# EAGLE board MOSFETboard (EAGLE 9.6.2)
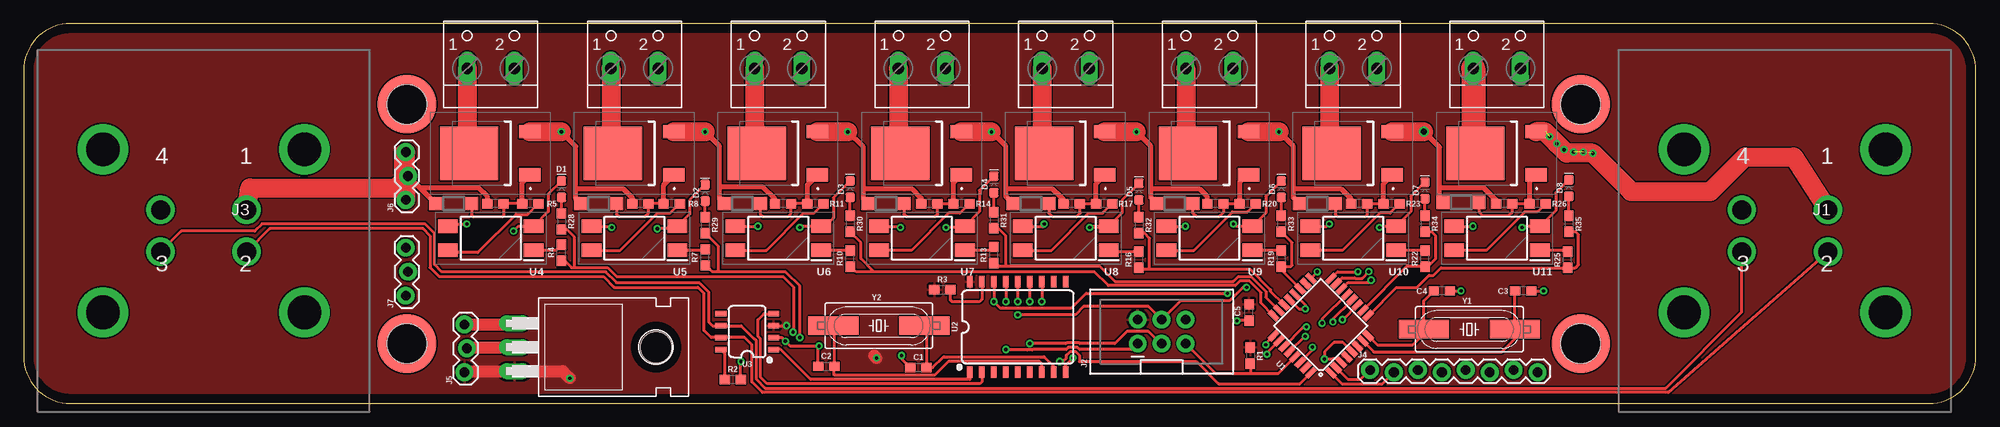
[diagram p0: board, top side]
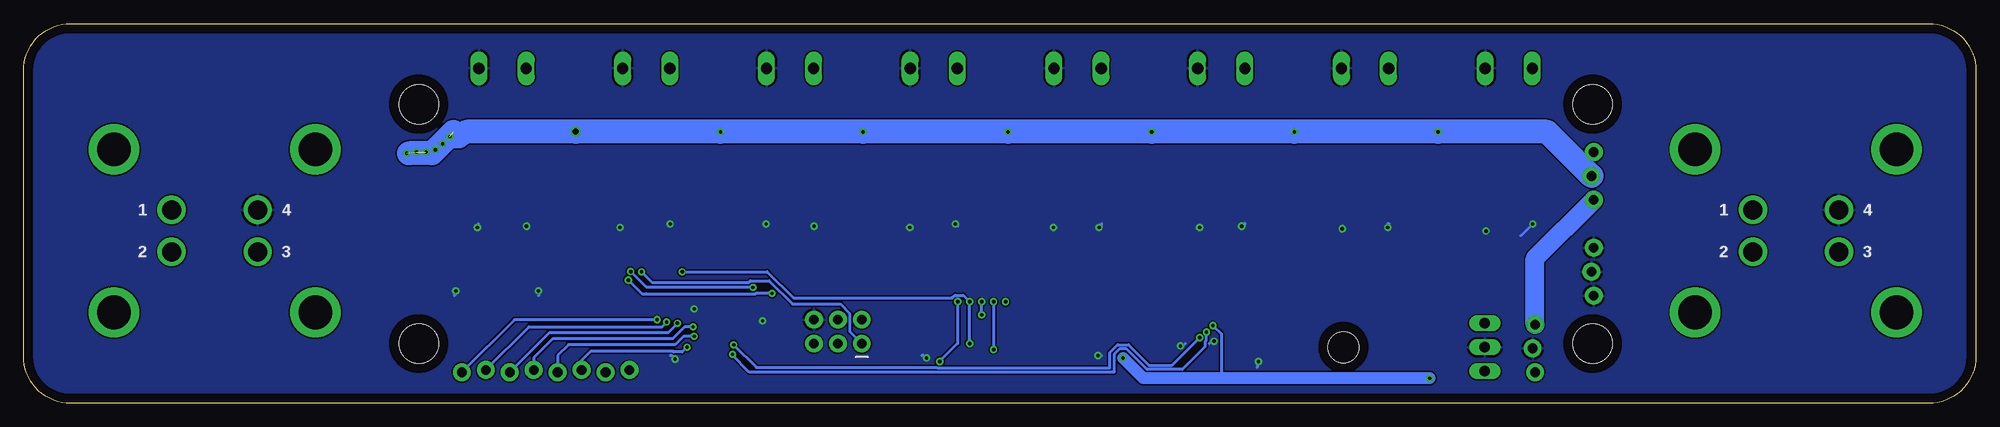
[diagram p1: board, bottom side, seen from below]

Size 206.99 x 40.31 mm. Coordinates in mm from the lower left corner, seen from the top.
Outline: 0,35.31 0,5 arc90 5,0 201.99,0 arc90 206.99,5 206.99,35.31 arc90 201.99,40.31 5,40.31 arc90 0,35.31
Copper layers (1*16): Top 0.035mm / dielectric 1.5mm / Bottom 0.035mm
Design rules "default": minimum track width 6mil, minimum drill 0.35mm, track to track 6mil, track to pad 6mil, pad to pad 6mil, via to via 6mil, smd to smd 6mil, copper to edge 40mil, drill to drill 6mil, minimum pad ring 10mil, minimum via ring 8mil, stop-mask expansion 4mil, vias tented up to drill 0mil, thermal gap 10mil
Net classes: 0 default: width 0.305 mm

## Footprints (pad centres in the part's own frame; a part is rotated, then mirrored left to right if it is on the bottom)
0603 = smd 1.1 x 1: 1 -0.85,0; 2 0.85,0
LED-0603 = smd 1 x 1: A -0.877,0; C 0.877,0
SOD123 = smd 1.4 x 1.4: A 1.9,0; C -1.9,0
TO220H = drill 1.118 long: 1 -2.54,-10.16; 2 0,-10.16; 3 2.54,-10.16 | hole 3.302: 0,4.826
DT154P = drill 2.01 pad 3.015: 1 4.599,2.215; 2 4.599,-2.235; 3 -4.521,-2.235; 4 -4.521,2.215 | drill 3.56 pad 5.34: MH1 -10.631,-8.66; MH2 -10.631,8.64; MH3 10.709,8.64; MH4 10.709,-8.66
2X3-SHROUDED = drill 1.016 pad 1.88: 1 -1.27,2.54; 2 1.27,2.54; 3 -1.27,0; 4 1.27,0; 5 -1.27,-2.54; 6 1.27,-2.54
1X08_LOCK = drill 1.016 pad 1.88: 1 0,0.127; 2 2.54,-0.127; 3 5.08,0.127; 4 7.62,-0.127; 5 10.16,0.127; 6 12.7,-0.127; 7 15.24,0.127; 8 17.78,-0.127
1X03_LOCK = drill 1.016 pad 1.88: 1 0,0.127; 2 2.54,-0.127; 3 5.08,0.127
IRFR9014TRPBFBE3 = smd 1.397 x 2.286: 1 -2.286,-6.435; 3 2.286,-6.435 | smd 5.69 x 6.18: 2 0,0
TQFP32-08 = smd 1.27 x 0.559: 1 -4.293,2.8; 2 -4.293,2; 3 -4.293,1.2; 4 -4.293,0.4; 5 -4.293,-0.4; 6 -4.293,-1.2; 7 -4.293,-2; 8 -4.293,-2.8; 17 4.293,-2.8; 18 4.293,-2; 19 4.293,-1.2; 20 4.293,-0.4; 21 4.293,0.4; 22 4.293,1.2; 23 4.293,2; 24 4.293,2.8 | smd 0.559 x 1.27: 9 -2.8,-4.293; 10 -2,-4.293; 11 -1.2,-4.293; 12 -0.4,-4.293; 13 0.4,-4.293; 14 1.2,-4.293; 15 2,-4.293; 16 2.8,-4.293; 25 2.8,4.293; 26 2,4.293; 27 1.2,4.293; 28 0.4,4.293; 29 -0.4,4.293; 30 -1.2,4.293; 31 -2,4.293; 32 -2.8,4.293
SO18W = smd 0.6 x 1.2: 1 -5.08,-4.788; 2 -3.81,-4.788; 3 -2.54,-4.788; 4 -1.27,-4.788; 5 0,-4.788; 6 1.27,-4.788; 7 2.54,-4.788; 8 3.81,-4.788; 9 5.08,-4.788; 10 5.08,4.788; 11 3.81,4.788; 12 2.54,4.788; 13 1.27,4.788; 14 0,4.788; 15 -1.27,4.788; 16 -2.54,4.788; 17 -3.81,4.788; 18 -5.08,4.788
SO08 = smd 0.6 x 1.2: 1 -1.905,-2.8; 2 -0.635,-2.8; 3 0.635,-2.8; 4 1.905,-2.8; 5 1.905,2.8; 6 0.635,2.8; 7 -0.635,2.8; 8 -1.905,2.8
SOP254P1016X460-4N = smd 2.1 x 1.45: 1 -4.55,1.27; 2 -4.55,-1.27; 3 4.55,-1.27; 4 4.55,1.27
M3SMDSTANDOFF = smd 6.2 x 6.2: P$1 0,0 | hole 4.2: 0,0
W237-102 = drill 1.194 long: 1 -2.5,-1.27; 2 2.5,-1.27
HC49UP = smd 5.334 x 1.93: 1 -4.826,0; 2 4.826,0

## Placement (x,y rotation side)
C1  22pF  [0603]  94.87,3.81 0 top
C2  22pF  [0603]  85.09,3.94 0 top
C3  22pF  [0603]  159,11.94 180 top
C4  22pF  [0603]  150.37,11.94 180 top
C5  1uF  [0603]  129.92,9.65 90 top
D1  [LED-0603]  57.02,22.73 90 top
D2  [LED-0603]  72.26,22.35 90 top
D3  [LED-0603]  87.63,22.73 90 top
D4  [LED-0603]  102.87,23.24 90 top
D5  [LED-0603]  118.24,22.48 90 top
D6  [LED-0603]  133.35,22.73 90 top
D7  [LED-0603]  148.59,22.61 90 top
D8  [LED-0603]  163.83,22.86 90 top
D9  [SOD123]  45.59,21.21 0 top
D10  [SOD123]  60.96,21.21 0 top
D11  [SOD123]  76.2,21.21 0 top
D12  [SOD123]  91.44,21.21 0 top
D13  [SOD123]  106.81,21.21 0 top
D14  [SOD123]  122.05,21.21 0 top
D15  [SOD123]  137.16,21.21 0 top
D16  [SOD123]  152.4,21.34 0 top
IC1  7805T  [TO220H]  62.23,5.97 270 top
J1  DT15-4P  [DT154P]  186.69,18.32 0 top
J2  [2X3-SHROUDED]  120.65,7.62 90 top
J3  DT15-4P  [DT154P]  19.05,18.32 0 top
J4  [1X08_LOCK]  142.75,3.43 0 top
J5  [1X03_LOCK]  46.86,3.3 90 top
J6  [1X03_LOCK]  40.64,21.59 90 top
J7  [1X03_LOCK]  40.64,11.43 90 top
Q9  IRFR9014TRPBF-BE3  [IRFR9014TRPBFBE3]  47.24,26.54 90 top
Q10  IRFR9014TRPBF-BE3  [IRFR9014TRPBFBE3]  62.48,26.54 90 top
Q11  IRFR9014TRPBF-BE3  [IRFR9014TRPBFBE3]  77.72,26.54 90 top
Q12  IRFR9014TRPBF-BE3  [IRFR9014TRPBFBE3]  92.96,26.54 90 top
Q13  IRFR9014TRPBF-BE3  [IRFR9014TRPBFBE3]  108.2,26.54 90 top
Q14  IRFR9014TRPBF-BE3  [IRFR9014TRPBFBE3]  123.44,26.54 90 top
Q15  IRFR9014TRPBF-BE3  [IRFR9014TRPBFBE3]  138.68,26.54 90 top
Q16  IRFR9014TRPBF-BE3  [IRFR9014TRPBFBE3]  153.92,26.54 90 top
R1  1k  [0603]  130.05,5.08 270 top
R2  10k  [0603]  75.18,2.54 0 top
R3  10k  [0603]  97.41,12.06 0 top
R4  470R  [0603]  57.02,16 90 top
R5  3.3k  [0603]  53.72,21.21 180 top
R6  33k  [0603]  50.04,21.21 180 top
R7  470R  [0603]  72.26,15.49 90 top
R8  3.3k  [0603]  68.71,21.21 180 top
R9  33k  [0603]  65.41,21.21 180 top
R10  470R  [0603]  87.63,15.37 90 top
R11  3.3k  [0603]  83.95,21.21 180 top
R12  33k  [0603]  80.52,21.21 180 top
R13  470R  [0603]  102.87,15.75 90 top
R14  3.3k  [0603]  99.44,21.21 180 top
R15  33k  [0603]  96.01,21.21 180 top
R16  470R  [0603]  118.24,15.24 90 top
R17  3.3k  [0603]  114.55,21.21 180 top
R18  33k  [0603]  111.12,21.21 180 top
R19  470R  [0603]  133.35,15.37 90 top
R20  3.3k  [0603]  129.79,21.21 180 top
R21  33k  [0603]  126.36,21.21 180 top
R22  470R  [0603]  148.59,15.37 90 top
R23  3.3k  [0603]  145.03,21.21 180 top
R24  33k  [0603]  141.6,21.21 180 top
R25  470R  [0603]  163.7,15.24 90 top
R26  3.3k  [0603]  160.53,21.21 180 top
R27  33k  [0603]  156.97,21.21 180 top
R28  1K  [0603]  57.02,19.3 270 top
R29  1K  [0603]  72.26,18.92 270 top
R30  1K  [0603]  87.63,19.05 270 top
R31  1K  [0603]  102.87,19.43 270 top
R32  1K  [0603]  118.24,18.92 270 top
R33  1K  [0603]  133.35,19.05 270 top
R34  1K  [0603]  148.59,19.05 270 top
R35  1K  [0603]  163.83,19.05 270 top
U1  ATMEGA328P_TQFP  [TQFP32-08]  137.54,8.26 135 top
U2  MCP2515  [SO18W]  105.41,8.13 0 top
U3  MCP2551  [SO08]  76.71,7.62 90 top
U4  LTV-817S  [SOP254P1016X460-4N]  49.53,17.53 180 top
U5  LTV-817S  [SOP254P1016X460-4N]  64.77,17.53 180 top
U6  LTV-817S  [SOP254P1016X460-4N]  80.01,17.53 180 top
U7  LTV-817S  [SOP254P1016X460-4N]  95.25,17.53 180 top
U8  LTV-817S  [SOP254P1016X460-4N]  110.49,17.53 180 top
U9  LTV-817S  [SOP254P1016X460-4N]  125.73,17.53 180 top
U10  LTV-817S  [SOP254P1016X460-4N]  140.97,17.53 180 top
U11  LTV-817S  [SOP254P1016X460-4N]  156.21,17.53 180 top
U$1  KEYSTONEM3  [M3SMDSTANDOFF]  40.64,31.75 0 top
U$2  KEYSTONEM3  [M3SMDSTANDOFF]  40.64,6.35 0 top
U$3  KEYSTONEM3  [M3SMDSTANDOFF]  165.1,31.75 0 top
U$4  KEYSTONEM3  [M3SMDSTANDOFF]  165.1,6.35 0 top
X2  [W237-102]  49.53,36.83 0 top
X3  [W237-102]  64.77,36.83 0 top
X4  [W237-102]  80.01,36.83 0 top
X5  [W237-102]  95.25,36.83 0 top
X6  [W237-102]  110.49,36.83 0 top
X7  [W237-102]  125.73,36.83 0 top
X8  [W237-102]  140.97,36.83 0 top
X9  [W237-102]  156.21,36.83 0 top
Y1  16MHz  [HC49UP]  153.29,7.87 0 top
Y2  8MHz  [HC49UP]  90.68,8.26 0 top

## Library data of the parts
C1-C5 = SparkFun-Capacitors; PROD_ID: CAP-07876
D1-D8 = SparkFun-LED
D9-D16 = diode
IC1 = linear
J1 J3 = DT15-4P; DESCRIPTION: Deutsch DT15 Series, 4.44mm Pitch 4 Way 2 Row Straight PCB Header, Solder Termination; HEIGHT: 30.35mm; MANUFACTURER_NAME: TE Connectivity; MANUFACTURER_PART_NUMBER: DT15-4P; MOUSER_PART_NUMBER: 571-DT15-4P; MOUSER_PRICE-STOCK: https://www.mouser.co.uk/ProductDetail/TE-Connectivity-DEUTSCH/DT15-4P?qs=vkMqrgFpRajtjo1r4fVe%2Fw%3D%3D
J2 = SparkFun-Connectors; PROD_ID: CONN-10681; SF_ID: PRT_10877
J4-J7 = SparkFun-Connectors
Q9-Q16 = SamacSys_Parts; DESCRIPTION: MOSFET 60V P-CH HEXFET MOSFET D; HEIGHT: 2.38mm; MANUFACTURER_NAME: Vishay; MANUFACTURER_PART_NUMBER: IRFR9014TRPBF-BE3; MOUSER_PART_NUMBER: 78-IRFR9014TRPBF-BE3; MOUSER_PRICE-STOCK: https://www.mouser.co.uk/ProductDetail/Vishay-Siliconix/IRFR9014TRPBF-BE3?qs=7MVldsJ5UaztV2jQZzH2pA%3D%3D
R1-R35 = SparkFun-Resistors; PROD_ID: RES-07856
U1 = SparkFun-IC-Microcontroller; PROD_ID: IC-09069
U2 = SparkFun-IC-Comms; PROD_ID: IC-09906
U3 = SparkFun-IC-Comms; PROD_ID: IC-09907
U4-U11 = SamacSys_Parts; DESCRIPTION: Optocoupler Transistor Output, 35V, SMD4 Lite-On LTV-817S DC Input Transistor Output Optocoupler, Surface Mount, 4-Pin SMD; HEIGHT: 4.6mm; MANUFACTURER_NAME: Lite-On; MANUFACTURER_PART_NUMBER: LTV-817S; MOUSER_PART_NUMBER: 859-LTV-817S; MOUSER_PRICE-STOCK: https://www.mouser.co.uk/ProductDetail/Lite-On/LTV-817S?qs=XpF7qU%252BvLkWYeWEC0OckNQ%3D%3D
U$1-U$4 = KeystoneSMD
X2-X9 = con-wago-500; MPN: 237-102; OC_FARNELL: unknown; OC_NEWARK: 70K9898
Y1 Y2 = SparkFun-Clocks; PROD_ID: XTAL-11706

## Nets
+12VCC1: D9.C D10.C D11.C D12.C D13.C D14.C D15.C D16.C IC1.1 J1.1 J3.1 J5.3 J6.1 J6.2 J6.3 Q9.3 Q10.3 Q11.3 Q12.3 Q13.3 Q14.3 Q15.3 Q16.3 R6.2 R9.2 R12.2 R15.2 R18.2 R21.2 R24.2 R27.2
ARDUINO0: J4.3 U1.30
ARDUINO1: U1.31
ARDUINO3: J4.2 U1.1
ARDUINO4: J4.1 U1.2
ARDUINO5: R25.1 R35.2 U1.9
ARDUINO6: R22.1 R34.2 U1.10
ARDUINO7: J4.8 U1.11
ARDUINO8: J4.7 U1.12
ARDUINO9: J4.6 U1.13
ARDUINO14: R13.1 R31.2 U1.23
ARDUINO15: R10.1 R30.2 U1.24
ARDUINO16: R7.1 R29.2 U1.25
ARDUINO17: R4.1 R28.2 U1.26
ARDUINO18: J4.5 U1.27
ARDUINO19: J4.4 U1.28
ARDUINOA6: R19.1 R33.2 U1.19
ARDUINOA7: R16.1 R32.2 U1.22
CAN_INT: U1.32 U2.12
CANH: J1.2 J3.2 U3.7
CANL: J1.3 J3.3 U3.6
CS: U1.14 U2.16
GND: C1.1 C2.1 C3.1 C4.1 C5.1 D1.C D2.C D3.C D4.C D5.C D6.C D7.C D8.C IC1.2 J1.4 J2.6 J3.4 J5.2 J7.1 J7.2 J7.3 R2.2 U1.3 U1.5 U1.20 U1.21 U2.9 U3.2 U4.2 U4.3 U5.2 U5.3 U6.2 U6.3 U7.2 U7.3 U8.2 U8.3 U9.2 U9.3 U10.2 U10.3 U11.2 U11.3 X2.2 X3.2 X4.2 X5.2 X6.2 X7.2 X8.2 X9.2
MISO: J2.1 U1.16 U2.15
MOSI: J2.4 U1.15 U2.14
N$1: U2.1 U3.1
N$2: U2.2 U3.4
N$3: C2.2 U2.7 Y2.1
N$4: C1.2 U2.8 Y2.2
N$5: C4.2 U1.8 Y1.1
N$6: C3.2 U1.7 Y1.2
N$7: R2.1 U3.8
N$8: R3.2 U2.17
N$9: R4.2 U4.1
N$10: R5.1 U4.4
N$11: D9.A Q9.1 R5.2 R6.1
N$12: R7.2 U5.1
N$13: R8.1 U5.4
N$14: D10.A Q10.1 R8.2 R9.1
N$15: R10.2 U6.1
N$16: R11.1 U6.4
N$17: D11.A Q11.1 R11.2 R12.1
N$18: R13.2 U7.1
N$19: R14.1 U7.4
N$20: D12.A Q12.1 R14.2 R15.1
N$21: R16.2 U8.1
N$22: R17.1 U8.4
N$23: D13.A Q13.1 R17.2 R18.1
N$24: R19.2 U9.1
N$25: R20.1 U9.4
N$26: D14.A Q14.1 R20.2 R21.1
N$27: R22.2 U10.1
N$28: R23.1 U10.4
N$29: D15.A Q15.1 R23.2 R24.1
N$30: R25.2 U11.1
N$31: R26.1 U11.4
N$32: D16.A Q16.1 R26.2 R27.1
N$33: D1.A R28.1
N$34: D2.A R29.1
N$35: D3.A R30.1
N$36: D4.A R31.1
N$37: D5.A R32.1
N$38: D6.A R33.1
N$39: D7.A R34.1
N$40: D8.A R35.1
OUTPUT1: Q9.2 X2.1
OUTPUT2: Q10.2 X3.1
OUTPUT3: Q11.2 X4.1
OUTPUT4: Q12.2 X5.1
OUTPUT5: Q13.2 X6.1
OUTPUT6: Q14.2 X7.1
OUTPUT7: Q15.2 X8.1
OUTPUT8: Q16.2 X9.1
RST: J2.5 R1.2 U1.29
SCK: J2.3 U1.17 U2.13
VCC: C5.2 IC1.3 J2.2 J5.1 R1.1 R3.1 U1.4 U1.6 U1.18 U2.18 U3.3

## Tracks (layer width: path | path; a pad name or v marks a point on that pad's centre or on a via)
+12VCC1  (via drill 0.35, 0.65)  (3 unrouted)
  Top 0.305: 159.77,28.83 Q16.3
  Top 0.508: D16.C 150.11,21.72 150.11,22.86 | v148.46,28.83 150.11,27.18 150.11,22.86 | D15.C 134.62,21.85 134.62,22.73 | v133.1,28.83 134.62,27.3 134.62,22.73 | D14.C 119.51,21.85 119.51,22.73 | v117.98,28.83 119.51,27.3 119.51,22.73 | D13.C 104.14,21.98 104.14,22.73 | v102.62,28.83 104.14,27.3 104.14,22.73 | D12.C 89.03,21.72 89.03,22.73 | v87.38,28.83 89.03,27.18 89.03,22.73 | D11.C 73.79,21.72 73.79,22.99 | v72.26,28.83 73.79,27.3 73.79,22.99 | D10.C 58.55,21.72 58.55,22.73 | v57.02,28.83 58.55,27.3 58.55,22.73 | R9.2 64.55,21.8 63.63,22.73 58.55,22.73 | R12.2 79.67,21.68 78.36,22.99 73.79,22.99 | R15.2 95.16,21.8 94.23,22.73 89.03,22.73 | R18.2 110.27,21.62 109.57,22.32 109.51,22.32 109.09,22.73 104.14,22.73 | R21.2 125.52,21.93 124.71,22.73 119.51,22.73 | R24.2 140.75,21.68 139.7,22.73 134.62,22.73 | R27.2 156.12,21.55 154.81,22.86 150.11,22.86 | R6.2 49.19,21.93 48.26,22.86 42.04,22.86 J6.2 D9.C
  Top 1.27: J5.3 51.94,8.38 IC1.1
  Top 2: J3.1 23.97,22.86 39.5,22.86 J6.2 | J1.1 187.66,26.16 182.5,26.16 178.82,22.48 170.43,22.48 v166.37,26.54 163.58,26.54 v162.56,27.56 161.29,28.83 Q16.3 | J6.1 40.51,23.88 J6.2 | J6.2 40.32,24.58 40.32,26.54 | J6.2 40.51,24.38 J6.3 | Q15.3 v148.46,28.83 | Q14.3 v133.1,28.83 | Q13.3 v117.98,28.83 | Q12.3 v102.62,28.83 | Q11.3 v87.38,28.83 | Q10.3 v72.26,28.83 | Q9.3 v57.02,28.83
  Bottom 0.305: 166.12,26.54 v166.37,26.54
  Bottom 2: J5.3 46.74,15.37 J6.1 | 160.02,28.83 160.78,28.07 162.05,28.07 v162.56,27.56
  Bottom 2.54: J6.2 45.47,28.83 v57.02,28.83 v72.26,28.83 v87.38,28.83 v102.62,28.83 v117.98,28.83 v133.1,28.83 v148.46,28.83 160.02,28.83 | 166.12,26.54 163.7,26.54 v163.32,26.92 161.42,28.83
  other vias: 164.34,26.67 165.35,26.67 161.8,28.32
ARDUINO0  (via drill 0.35)
  Top 0.305: U1.30 136.65,5.67 v136.65,5.97
  Bottom 0.305: v136.65,5.97 137.16,5.46 138.04,5.46 138.11,5.54 140.97,5.54 146.86,5.54 147.83,4.57 J4.3
ARDUINO3
  Top 0.305: U1.1 139.75,2.08 144.07,2.08 J4.2
ARDUINO4
  Top 0.305: U1.2 140.43,2.54 141.73,2.54 J4.1
ARDUINO5
  Top 0.305: U1.9 145.55,12.31 147.71,12.31 148.99,13.59 149.48,13.59 150.28,14.39 R25.1 164.5,14.39 164.85,14.73 164.85,17.91 164.55,18.2 R35.2
ARDUINO6
  Top 0.305: U1.10 146.63,14.52 R22.1 148.88,14.52 149.73,15.37 149.73,17.78 149.31,18.2 R34.2
ARDUINO7  (via drill 0.35)
  Top 0.305: U1.11 139.87,8.89 v139.83,8.89
  Bottom 0.305: J4.8 154.94,8.89 v139.83,8.89
ARDUINO8  (via drill 0.35)
  Top 0.305: U1.12 138.65,8.8 v138.81,8.64
  Bottom 0.305: v138.81,8.64 139.32,8.13 153.42,8.13 J4.7
ARDUINO9  (via drill 0.35)
  Top 0.305: U1.13 137.67,8.95 v137.67,8.51
  Bottom 0.305: v137.67,8.51 138.68,7.49 151.26,7.49 J4.6
ARDUINO14
  Top 0.305: 104.14,14.61 103.38,14.61 103.08,14.9 R13.1 | 104.14,14.61 114.05,14.61 115.7,12.95 128.27,12.95 128.78,13.46 130.14,13.46 131.7,11.9 131.7,11.27 U1.23 | 104.14,14.61 104.14,17.78 103.34,18.58 R31.2
ARDUINO15
  Top 0.305: R10.1 87.72,14.52 88.27,13.97 90.17,13.97 | 90.17,13.97 113.54,13.97 115.01,12.5 128.46,12.5 128.97,13 129.95,13 131.19,11.76 131.19,10.64 U1.24 | 90.17,13.97 88.77,15.37 88.77,17.06 R30.2
ARDUINO16  (via drill 0.35)
  Top 0.305: v131.7,6.22 131.7,6.37 U1.25 | v82.3,6.98 82.3,12.45 80.77,13.97 73.66,13.97 | R7.1 72.35,14.64 73.02,13.97 73.66,13.97 | R29.2 73.66,16.68 73.66,13.97
  Bottom 0.305: v131.7,6.22 129.29,3.81 110.19,3.81 110.14,3.76 91.82,3.76 91.82,5.4 91,6.22 89.84,6.22 87.69,4.06 85.22,4.06 v82.3,6.98
ARDUINO17  (via drill 0.35)
  Top 0.305: R4.1 57.37,15.15 58.09,14.43 58.42,14.43 | U1.26 131.83,5.37 v131.83,5.21 | 58.42,14.43 61.91,14.43 62.88,13.46 80.52,13.46 81.66,12.32 81.66,7.63 v81.59,7.56 | 58.42,14.43 58.42,17.65 57.62,18.45 R28.2
  Bottom 0.305: v131.83,5.21 131.83,5.08 130.05,3.3 91.36,3.3 91.36,5.21 90.81,5.77 90.03,5.77 87.88,3.61 84.15,3.61 81.74,6.02 81.74,6.54 81.59,6.69 v81.59,7.56
ARDUINO18  (via drill 0.35)
  Top 0.305: U1.27 135.72,8.13 v136.02,8.13
  Bottom 0.305: v136.02,8.13 136.91,8.13 138.18,6.86 150.88,6.86 152.91,4.83 J4.5
ARDUINO19  (via drill 0.35)
  Top 0.305: U1.28 135.83,7.11 v135.89,7.11
  Bottom 0.305: v135.89,7.11 137.03,7.11 137.92,6.22 149.22,6.22 150.37,5.08 J4.4
ARDUINOA6
  Top 0.305: R33.2 134.49,17.06 134.49,14.68 134.33,14.52 R19.1 133.35,14.14 U1.19
ARDUINOA7
  Top 0.305: R16.1 118.45,14.39 118.62,14.22 119.38,14.22 | 119.38,14.22 119.38,17.53 118.83,18.07 R32.2 | U1.22 132.21,11.89 132.21,12.06 130.05,14.22 119.38,14.22
CAN_INT  (via drill 0.35)
  Top 0.305: U2.12 v107.95,10.79 | U1.32 135.33,2.08 126.69,2.08 124.33,4.45 111.93,4.45 111.93,5.11 111.53,5.51 110.97,5.51 110.57,5.11 110.57,4.79 110.22,4.45 v109.85,4.45
  Bottom 0.305: v107.95,10.79 107.95,6.35 v109.85,4.45
CANH
  Top 0.305: J1.2 174.37,1.17 78.33,1.17 77.22,2.29 77.22,6.22 76.45,6.98 U3.7 72.9,6.98 72.14,7.75 72.14,11.68 71.5,12.32 62.61,12.32 61.47,13.46 44.07,13.46 43.1,14.43 43.1,17.78 42.34,18.54 26.11,18.54 J3.2
CANL
  Top 0.305: J1.3 182.17,9.7 174.09,1.63 78.64,1.63 77.67,2.59 77.67,6.67 77.47,6.87 77.47,6.86 76.07,8.26 U3.6 73.02,8.26 72.64,8.64 72.64,11.82 71.64,12.83 62.87,12.83 61.72,13.97 44.32,13.97 43.56,14.73 43.56,18.05 42.56,19.05 25.27,19.05 24.51,18.29 16.73,18.29 J3.3
CS  (via drill 0.35)
  Top 0.305: U2.16 v102.87,10.79 103.5,10.16 103.81,10.16 103.86,10.11 111.08,10.11 112.65,11.68 v127.63,11.68 | U1.14 140.42,12.83 142.62,12.83 v142.88,13.08
  Bottom 0.305: v127.63,11.68 129.34,11.68 129.38,11.64 140.97,11.64 141.43,11.64 v142.88,13.08
GND  (via drill 0.35)
  Top 0.305: D8.C 162.43,22.34 162.43,20.47 U11.2 159,18.8 v158.88,18.67 | D7.C 147.07,21.96 147.07,20.34 U10.2 143.89,18.8 v143.76,18.67 | D6.C 131.7,21.96 131.7,20.21 U9.2 128.52,18.8 v128.27,19.05 | D5.C 116.46,21.58 116.46,20.21 U8.2 | D4.C 101.35,22.59 101.35,20.34 U7.2 99.67,18.67 v97.79,18.67 | D3.C 85.85,21.83 85.85,19.68 84.45,18.29 84.45,18.69 U6.2 82.42,18.8 v82.3,18.67 | D2.C 70.61,21.58 70.61,20.09 U5.2 69.07,18.54 v67.18,18.54 | D1.C 55.63,22.21 55.63,20.34 U4.2 52.45,18.8 v51.94,18.29 | U4.3 45.23,19.05 v46.99,19.05 | U5.3 62.23,18.8 v62.36,18.67 | U6.3 v77.85,18.8 | U7.3 92.84,18.8 v92.96,18.67 | U8.3 108.2,18.8 v108.2,19.05 | U8.2 114.91,18.67 v113.03,18.67 | U8.2 113.03,18.8 | U9.3 v123.19,18.8 | U10.3 138.18,18.8 v138.43,19.05 | U1.21 135.2,10.03 v135.89,10.03 135.89,10.47 U1.20 | U1.3 139.34,4.76 138.78,4.76 138.73,4.7 v137.92,4.7 137.92,5.46 138.94,6.48 139.88,6.48 U1.5 | C5.1 128.69,8.8 v128.65,8.76 | U2.9 110.49,4.06 v111.25,4.83 | U11.3 v153.67,18.8 | C4.1 v152.4,11.94 | C3.1 v161.16,11.94 | C1.1 93.09,4.74 v93.09,5.08 | C2.1 84.24,6.01 | 84.24,6.01 v84.33,6.1 | U3.2 80.39,6.98 v80.77,6.6 81.28,6.1 84.15,6.1 84.24,6.01 | R2.2 76.03,4.41 v76.07,4.45
  Top 1.27: J5.2 47.12,5.97 IC1.2
  Bottom 0.305: v46.99,19.05 48.26,17.78 | v62.36,18.67 62.23,18.8 62.23,19.05 62.36,19.05 | v77.85,18.8 77.72,18.8 77.47,19.05 77.53,19.11 | v92.96,18.67 92.71,18.92 92.71,19.05 | v108.2,19.05 107.95,19.05 107.95,18.8 | v123.19,18.8 123.19,19.05 | v135.89,10.03 136.02,10.03 136.14,9.91 136.08,9.84 | v137.92,4.7 138.3,5.08 138.43,5.08 | v111.25,4.83 111.51,5.08 111.76,5.08 | v153.67,18.8 153.67,19.05 153.54,19.05 | v158.88,18.67 158.75,18.8 158.75,19.05 | v152.4,11.94 152.4,11.43 | v161.16,11.94 161.29,11.81 161.29,11.43 | v93.09,5.08 92.71,5.08 | v84.33,6.1 84.07,6.1 83.82,6.35 | v80.77,6.6 81.03,6.6 81.28,6.35 | v76.07,4.45 76.2,4.32 76.2,3.81
  pour Bottom: 0,40.64 0,0 45.72,0 207.01,0 207.01,40.64
MISO  (via drill 0.35)
  Top 0.305: U2.15 v104.14,10.79 | v104.14,5.71 106.35,5.71 106.4,5.67 106.96,5.67 107.01,5.71 110.53,5.71 110.78,5.97 111.72,5.97 111.97,5.71 117.47,5.71 J2.1 | U1.16 139.3,13.97 v141.48,13.97
  Bottom 0.305: v104.14,10.79 v104.14,5.71 | v141.48,13.97 140.34,12.83 130.12,12.83 129.95,13 127.94,13 125.48,10.54 120.4,10.54 119.41,9.55 119.41,7.64 J2.1
MOSI  (via drill 0.35)
  Top 0.305: v105.41,10.79 U2.14 | v105.41,9.4 111.51,9.4 112.39,10.29 119.25,10.29 J2.4 122.68,10.92 127.89,10.92 129.29,12.32 v129.67,12.32 | U1.15 139.79,13.33 141.15,13.33 141.19,13.29 141.92,13.29 v142.62,13.99
  Bottom 0.305: v105.41,9.4 v105.41,10.79 | v129.67,12.32 140.95,12.32 v142.62,13.99
N$1
  Top 0.305: U3.1 80.26,5.71 83.44,2.54 100.33,2.54 U2.1
N$2
  Top 0.305: U2.2 101.6,2.29 101.4,2.08 78.83,2.08 78.13,2.78 78.13,6.86 77.85,7.13 77.85,8.89 78.49,9.53 U3.4
N$3
  Top 0.305: U2.7 107.95,4.19 107.7,4.45 98.04,4.45 96.6,3 85.94,3 C2.2 85.94,8.17 Y2.1
N$4
  Top 0.305: U2.8 109.22,3.94 108.2,4.95 97.54,4.95 96.39,3.81 C1.2 95.72,8.04 Y2.2
N$5
  Top 0.305: U1.8 143.53,6.22 147.32,6.22 148.46,7.37 Y1.1 148.46,10.88 C4.2
N$6
  Top 0.305: U1.7 143.16,5.46 156.72,5.46 158.11,6.86 Y1.2 158.11,11.9 C3.2
N$7
  Top 0.305: U3.8 74.33,5.29 R2.1
N$8
  Top 0.305: U2.17 101.6,11.05 101.35,10.79 98.42,10.79 98.26,10.96 R3.2
N$9
  Top 0.305: R4.2 56.43,16.26 U4.1
N$10
  Top 0.305: U4.4 45.23,16 48.16,16 52.22,20.07 53.43,20.07 R5.1
N$11
  Top 0.305: R5.2 R6.1 50.93,21.17 50.93,19.94 50.8,19.81 47.62,19.81 47.49,19.94 D9.A
  Top 0.508: R5.2 52.87,23.45 Q9.1
N$12
  Top 0.305: R7.2 72.17,16.26 U5.1
N$13
  Top 0.305: U5.4 63.27,16.26 67.2,20.19 68.54,20.19 R8.1
N$14
  Top 0.305: R8.2 R9.1 66.25,20.15 65.91,19.81 63.12,19.81 62.86,20.07 D10.A
  Top 0.508: R8.2 67.86,23.2 Q10.1
N$15
  Top 0.305: R10.2 87.59,16.26 U6.1
N$16
  Top 0.305: U6.4 78.76,16.26 82.7,20.19 83.78,20.19 R11.1
N$17
  Top 0.305: R11.2 R12.1 81.37,20.15 81.03,19.81 78.36,19.81 78.1,20.07 D11.A
  Top 0.508: R11.2 83.1,23.2 Q11.1
N$18
  Top 0.305: R13.2 102.53,16.26 U7.1
N$19
  Top 0.305: U7.4 94.13,16.26 98.07,20.19 99.27,20.19 R14.1
N$20
  Top 0.305: R15.1 96.9,21.21 | 96.9,21.21 R14.2 | D12.A 93.34,20.07 93.6,19.81 96.65,19.81 96.9,20.07 96.9,21.21
  Top 0.508: R14.2 98.59,23.45 Q12.1
N$21
  Top 0.305: U8.1 115.21,16.09 R16.2
N$22
  Top 0.305: U8.4 108.99,16.26 112.92,20.19 114.39,20.19 R17.1
N$23
  Top 0.305: R18.1 112.01,21.21 | 112.01,21.21 R17.2 | D13.A 108.71,20.2 109.09,19.81 111.63,19.81 112.01,20.19 112.01,21.21
  Top 0.508: R17.2 113.7,23.32 Q13.1
N$24
  Top 0.305: U9.1 130.32,16.22 R19.2
N$25
  Top 0.305: U9.4 124.1,16.26 128.16,20.32 129.75,20.32 R20.1
N$26
  Top 0.305: R21.1 127.25,21.21 | 127.25,21.21 R20.2 | D14.A 123.95,20.2 124.33,19.81 126.75,19.81 127.25,20.32 127.25,21.21
  Top 0.508: R20.2 128.94,23.53 129.67,24.26 Q14.1
N$27
  Top 0.305: R22.2 148.55,16.26 U10.1
N$28
  Top 0.305: U10.4 139.85,16.26 143.79,20.19 144.87,20.19 R23.1
N$29
  Top 0.305: R23.2 R24.1 142.45,20.03 142.24,19.81 139.32,19.81 139.06,20.07 D15.A
  Top 0.508: R23.2 144.18,23.32 Q15.1
N$30
  Top 0.305: R25.2 163.54,16.26 U11.1
N$31
  Top 0.305: U11.4 155.09,16.26 159.15,20.32 160.49,20.32 R26.1
N$32
  Top 0.305: R26.2 R27.1 157.82,20.28 157.48,19.94 154.69,19.94 154.3,20.32 D16.A
  Top 0.508: R26.2 159.68,23.58 Q16.1
N$33
  Top 0.305: R28.1 D1.A
N$34
  Top 0.305: R29.1 D2.A
N$35
  Top 0.305: R30.1 D3.A
N$36
  Top 0.305: R31.1 D4.A
N$37
  Top 0.305: R32.1 D5.A
N$38
  Top 0.305: R33.1 D6.A
N$39
  Top 0.305: R34.1 D7.A
N$40
  Top 0.305: R35.1 D8.A
OUTPUT1
  Top 2: X2.1 47.03,26.76 Q9.2
OUTPUT2
  Top 2: X3.1 62.27,26.76 Q10.2
OUTPUT3
  Top 2: X4.1 77.51,26.76 Q11.2
OUTPUT4
  Top 2: X5.1 92.75,25.44 92.71,25.4 92.71,26.29 Q12.2
OUTPUT5
  Top 2: X6.1 107.99,26.76 Q13.2
OUTPUT6
  Top 2: X7.1 123.23,26.76 Q14.2
OUTPUT7
  Top 2: X8.1 138.47,26.71 138.43,26.67 138.56,26.54 Q15.2
OUTPUT8
  Top 2.54: X9.1 153.71,26.76 Q16.2
RST
  Top 0.305: J2.5 126.36,3.17 130.05,3.17 | U1.29 133.03,3.17 130.05,3.17 | R1.2 130.05,3.17
SCK  (via drill 0.35)
  Top 0.305: v106.68,10.79 U2.13 | J2.3 120.52,6.35 119.25,7.62 116.97,7.62 115.7,6.35 111.99,6.35 111.91,6.42 110.59,6.42 110.52,6.35 v106.68,6.35 | v137.16,13.97 137.16,13.95 U1.17
  Bottom 0.305: v106.68,6.35 v106.68,10.79 107.36,11.48 108.23,11.48 108.53,11.18 125.35,11.18 128.14,13.97 v137.16,13.97
VCC  (via drill 0.35)
  Top 0.305: U3.3 v80.9,8.26
  Top 1.27: J5.1 46.86,3.43 IC1.3 57.15,3.43 v57.91,2.67 | v90.42,4.83 90.17,5.08
  Bottom 0.305: v80.9,8.26 80.01,7.37 80.01,2.67
  Bottom 1.27: v57.91,2.67 80.01,2.67 88.27,2.67 v90.42,4.83
  pour Top: 0,40.64 0,0 207.01,0 207.01,40.64

## Text on the board
tPlace: 4 | 1 | 4 | 1 | 3 | 2 | 3 | 2